# Altium PCB PCB_Koruza_expander_board.PcbDoc
Units mm, origin at the board's own origin, x right, y up, seen from the top; angles counter-clockwise.
Board outline 88.46 x 79.88 mm, 2 copper layers (Top Layer, Bottom Layer), stack 1.671 mm thick; 71 components, 51 nets, 238 pads, 221 vias.
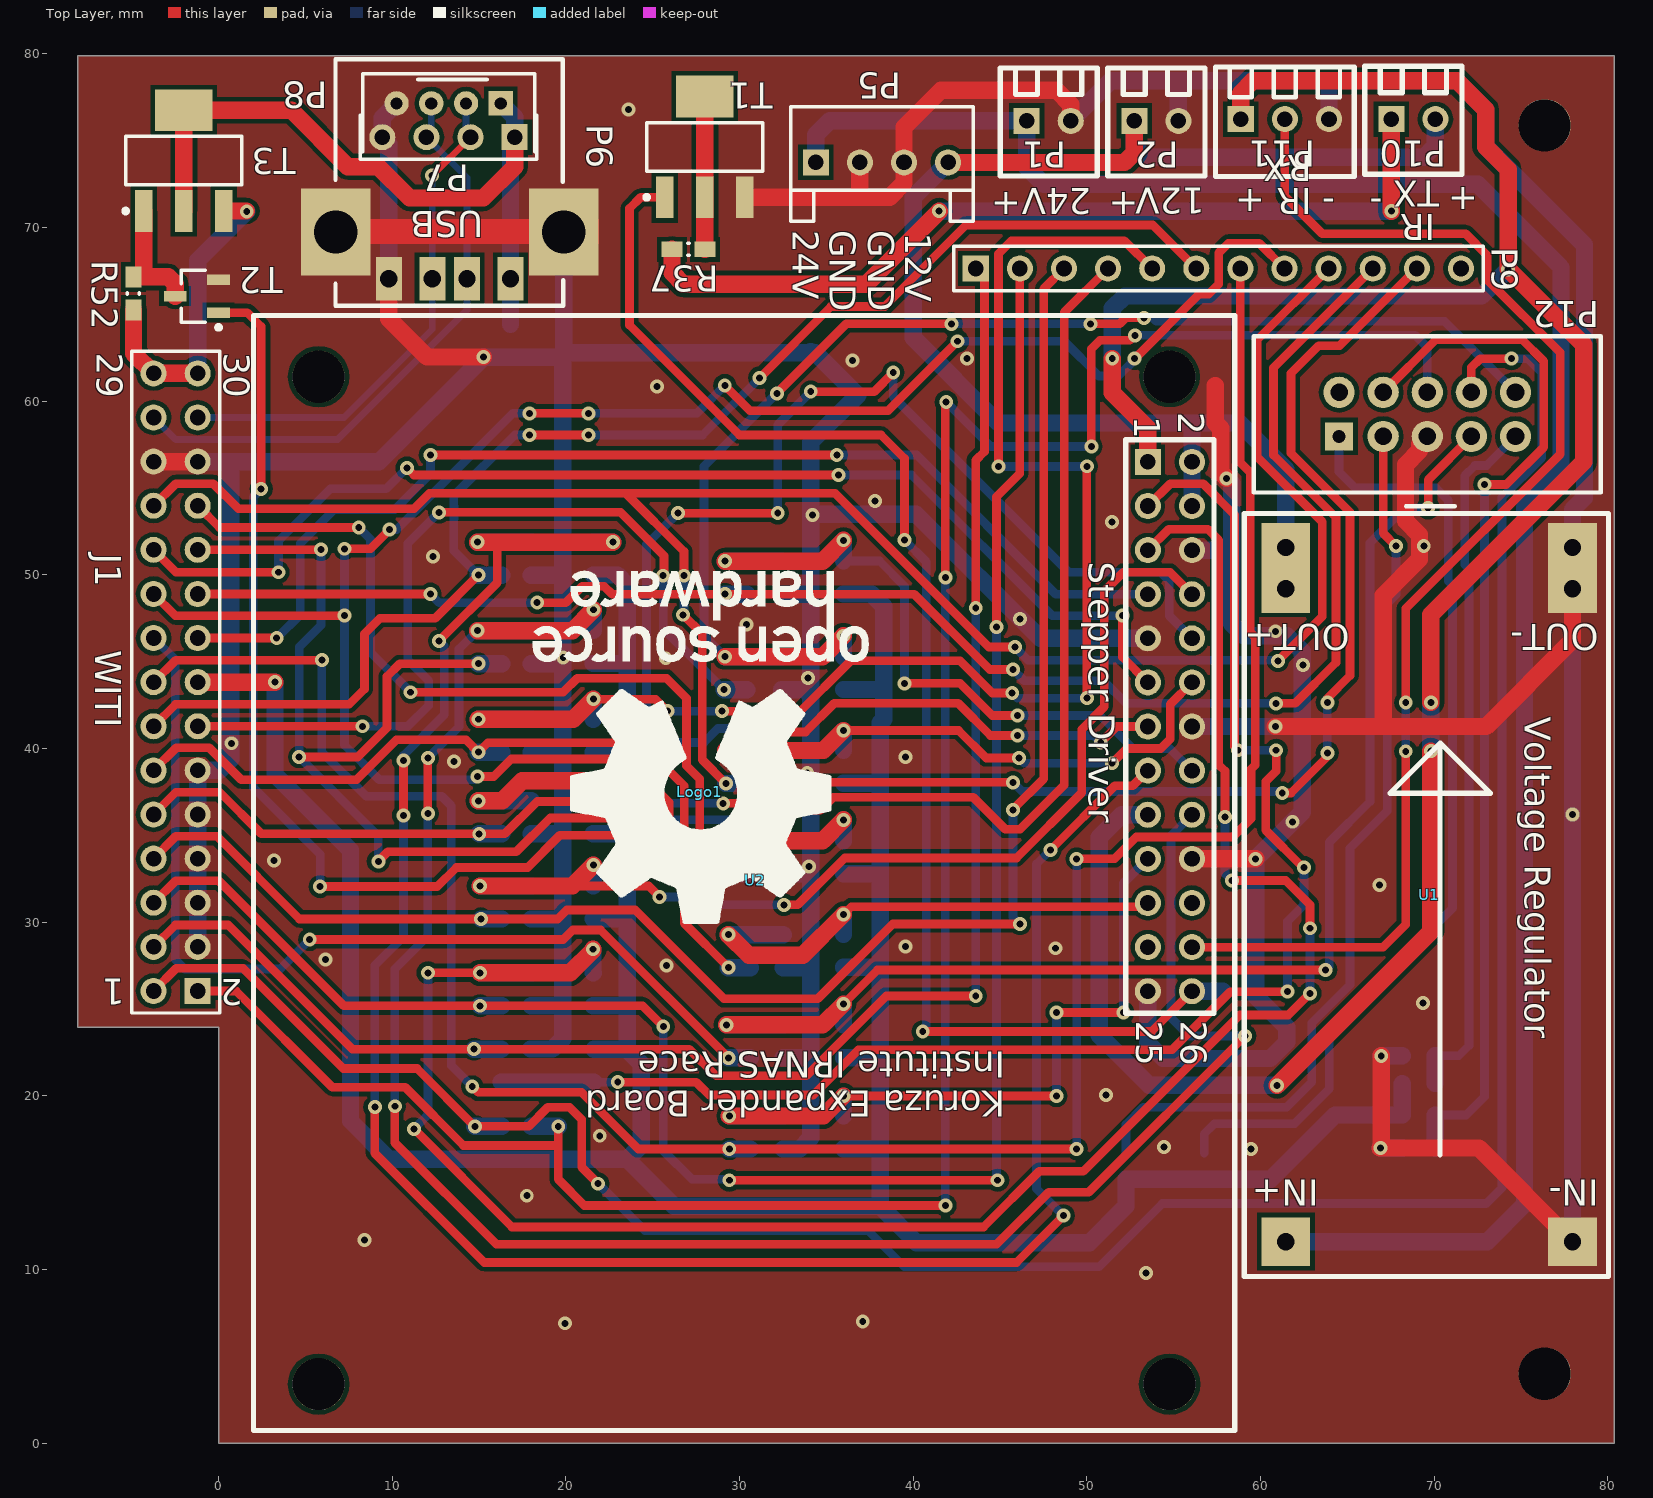
[diagram p0: Top Layer view]
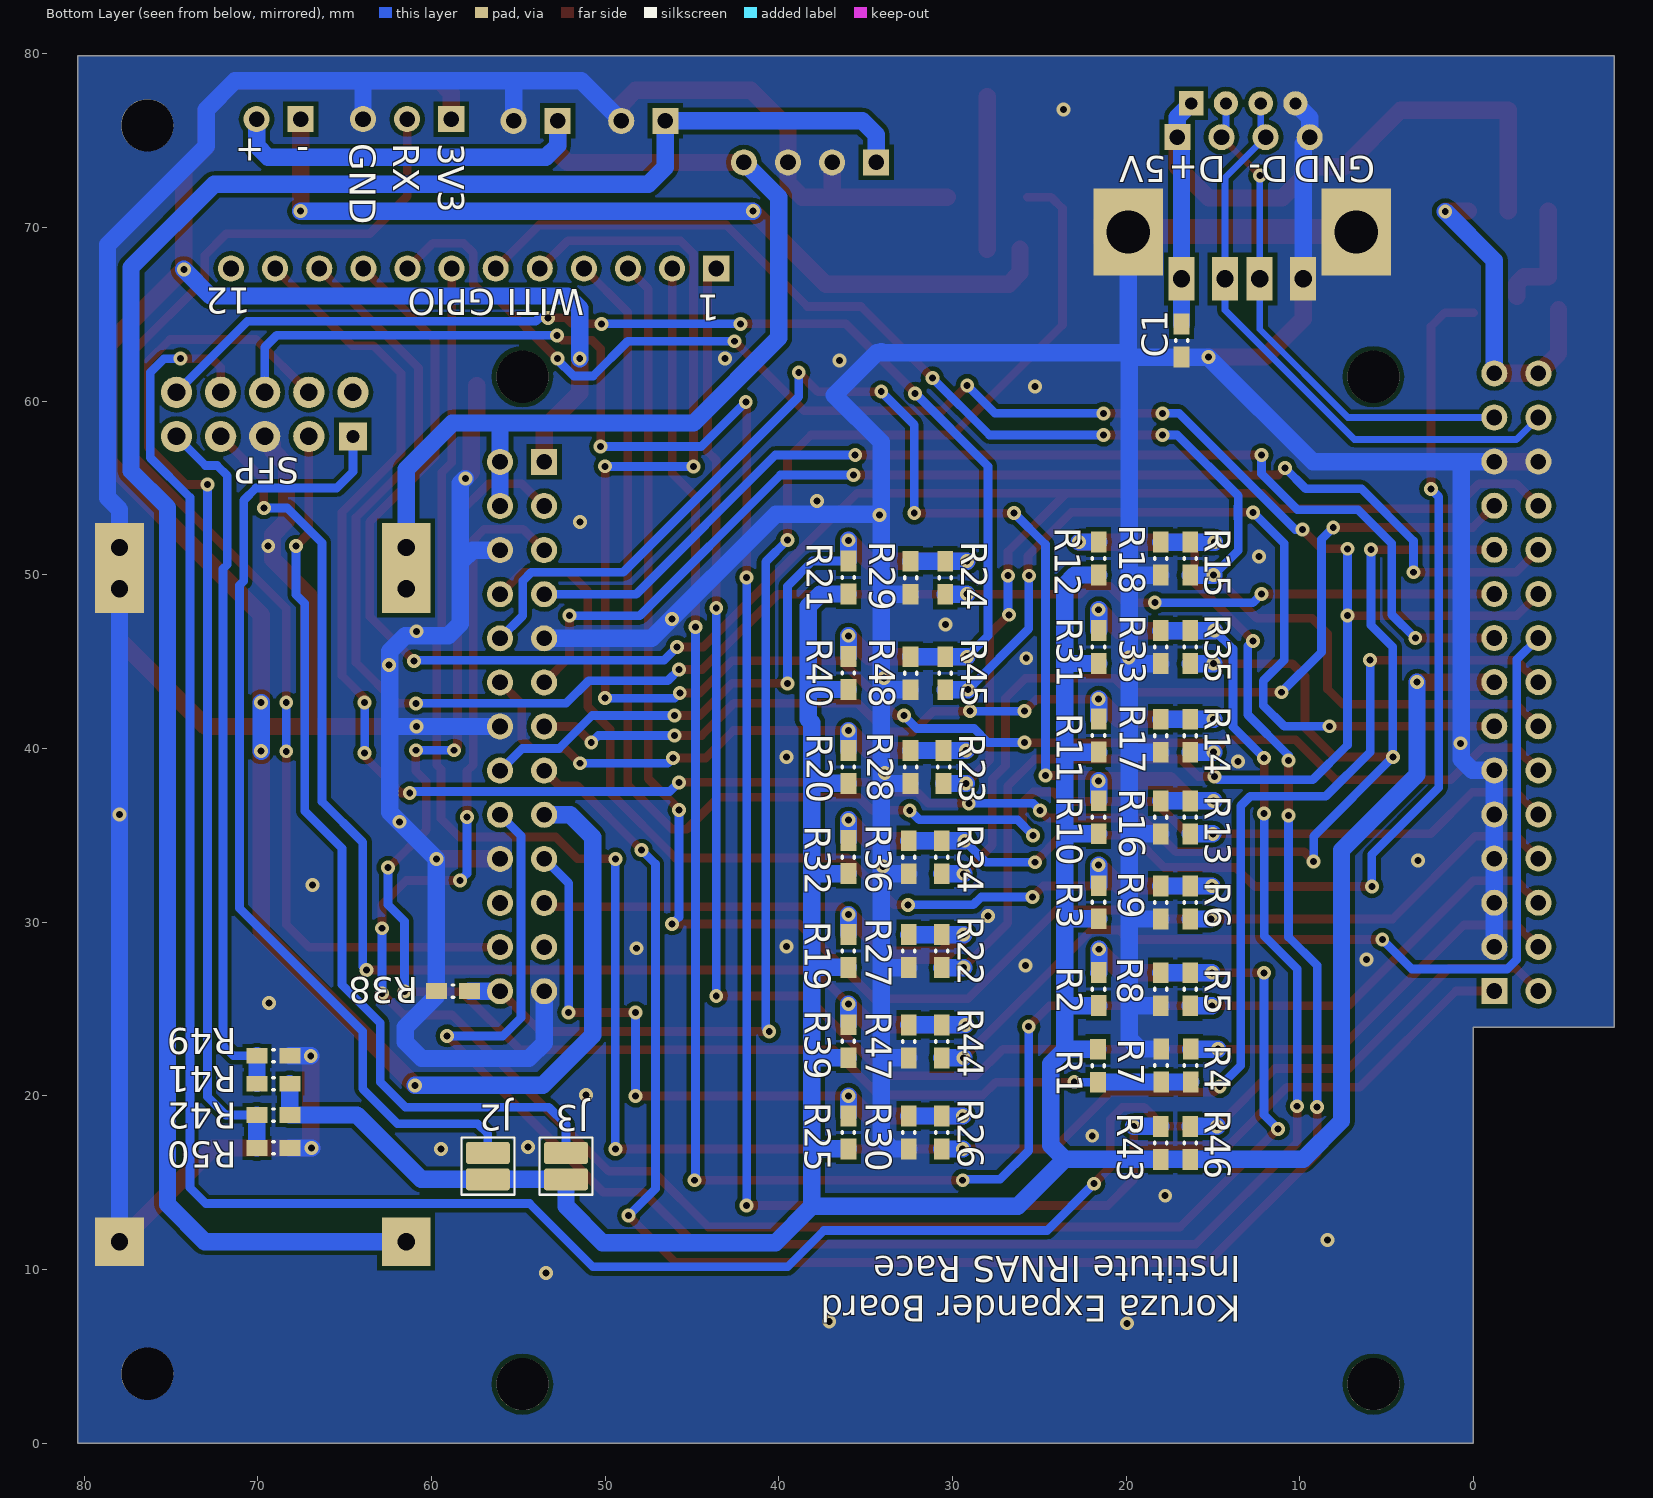
[diagram p1: Bottom Layer view, seen from below]

## Layer stack, top to bottom
Top Solder: solder mask 0.0102, Solder Resist, Dk 3.5
Top Layer: signal copper 0.0356
Dielectric 1: dielectric 1.6, FR-4, Dk 4.8
Bottom Layer: signal copper 0.0356
Bottom Solder: solder mask 0.0102, Solder Resist, Dk 3.5

## Board outline
-8.1,23.94 -8.1,79.883 80.36,79.883 80.36,0 0,0 0,23.94

## Design rules (kind name [scope] priority, off if disabled: settings)
Clearance Clearance_2 [InPolygon vs InPolygon] p1: gap=0.254
Clearance Clearance_3 [InPolygon] p2: gap=0.254
Clearance [All] p3: gap=0.203
Clearance Clearance_1 [IsVia vs IsNet] p4: gap=0.203
ComponentClearance [All] p1 off: gap=0.254 collisioncheckmode=3 verticalgap=0.254 showdistances=FALSE
DiffPairsRouting [All] p1: maxlimit=0.254 minlimit=0.203 mostfreqgap=0.254 toplayer_minwidth=0.203 toplayer_maxwidth=0.381 toplayer_prefwidth=0.381 bottomlayer_minwidth=0.203 bottomlayer_maxwidth=0.381 bottomlayer_prefwidth=0.381 maxuncoupledlength=12.7
HoleSize [All] p1: absolutevalues=TRUE maxlimit=100 minlimit=0.025 maxpercent=80.000 minpercent=20.000
MinimumSolderMaskSliver [All] p1: minsoldermaskwidth=0.102
PlaneConnect [All] p1: planeconnectstyle=Direct reliefexpansion=0.508 reliefentries=4 reliefconductorwidth=0.254 reliefairgap=0.254
PolygonConnect [All] p1: connectstyle=Direct reliefconductorwidth=0.254 reliefentries=4 polygonreliefangle="90 Angle" airgapwidth=0.254
RoutingVias [All] p1: holewidth=0.3 width=0.6 viastyle="Through Hole" minholewidth=0.3 minwidth=0.6 maxholewidth=1.27 maxwidth=2.54
SilkToSilkClearance [All] p1: silktosilkclearance=0
SilkToSolderMaskClearance [IsPad] p1: minsilkscreentomaskgap=0.025 clearancetoexposedcopper=TRUE
SolderMaskExpansion [All] p1: expansion=0.102
Width [All] p1: maxlimit=2.54 minlimit=0.203 preferedwidth=0.254
23 further rules are at their usual default settings.

## Classes and differential pairs
component class Sheet1_PWR_connectors: P1 P2 P5 U1
component class Sheet2_WITI_Board_USB: C1 J1 P6 P7 P8 P9 R1 R2 R3 R4 R5 R6 R7 R8 R9 R10 R11 R12 R13 R14 R15 R16 R17 R18 R19 R20 R21 R22 R23 R24 R25 R26 R27 R28 R29 R30 R31 R32 R33 R34 R35 R36 R52 T2 T3
component class Sheet3_IR: P10 P11 R37 R38 T1
component class Sheet4_SFP_StepperDriver: J2 J3 P12 R39 R40 R41 R42 R43 R44 R45 R46 R47 R48 R49 R50 U2
differential pair USB: +USB_P -USB_N

## Components (designator, comment, footprint, x,y, rotation, side; value= is the part's Value field where it differs from the comment)
C1 "0603" 0603_HandSoldering 16.81,63.49 r90 bottom
J1 "WITI_board_header_connector" HDR2X15 -1.2,26.04 r90 top locked
J2 "Jumper" JUMP1 56.75,15.95 r90 bottom
J3 "Jumper" JUMP1 52.25,15.95 r270 bottom
Logo1 "" OpenSourceLOGO 27.71,37.5 r180 top
P1 "term_block_2_45mm" term_block_2_45mm 47.8,76.14 r0 top
P2 "term_block_2_45mm" term_block_2_45mm 54,76.14 r0 top
P5 "Pwr Header" HDR1X4_CONN 38.2,73.75 r0 top
P6 "USB" "USB A THT" 16.81,67.04 r180 top
P7 "Header 4" HDR1X4 17.05,75.2 r180 top
P8 "Header 4, 2mm" HDR1X4_2MM 10.25,77.15 r180 top
P9 "Header 12" HDR1X12 43.6,67.64 r0 top
P10 "IR LED connector" term_block_2_45mm 68.8,76.24 r0 top
P11 "IR RX connector" TERM_BLOCK_3POLE_2_45MM 61.4,76.24 r0 top
P12 "SFP_IDC_connector" IDC10 69.6,59.24 r90 top locked
R1 "0603" 0603_HandSoldering 21.616,21.74 r90 bottom locked
R2 "0603" 0603_HandSoldering 21.584,26.14 r270 bottom locked
R3 "0603" 0603_HandSoldering 21.584,31.14 r270 bottom locked
R4 "0603" 0603_HandSoldering 16.284,21.74 r270 bottom locked
R5 "0603" 0603_HandSoldering 16.316,26.14 r90 bottom locked
R6 "0603" 0603_HandSoldering 16.316,31.14 r90 bottom locked
R7 "0603" 0603_HandSoldering 17.984,21.74 r270 bottom locked
R8 "0603" 0603_HandSoldering 18.016,26.14 r90 bottom locked
R9 "0603" 0603_HandSoldering 18.016,31.14 r90 bottom locked
R10 "0603" 0603_HandSoldering 21.584,36.04 r270 bottom locked
R11 "0603" 0603_HandSoldering 21.584,40.74 r270 bottom locked
R12 "0603" 0603_HandSoldering 21.584,50.94 r270 bottom locked
R13 "0603" 0603_HandSoldering 16.316,36.04 r90 bottom locked
R14 "0603" 0603_HandSoldering 16.316,40.74 r90 bottom locked
R15 "0603" 0603_HandSoldering 16.316,50.94 r90 bottom locked
R16 "0603" 0603_HandSoldering 18.016,36.04 r90 bottom locked
R17 "0603" 0603_HandSoldering 18.016,40.74 r90 bottom locked
R18 "0603" 0603_HandSoldering 18.016,50.94 r90 bottom locked
R19 "0603" 0603_HandSoldering 35.984,28.34 r270 bottom locked
R20 "0603" 0603_HandSoldering 35.984,38.94 r270 bottom locked
R21 "0603" 0603_HandSoldering 35.984,49.84 r270 bottom locked
R22 "0603" 0603_HandSoldering 30.616,28.34 r90 bottom locked
R23 "0603" 0603_HandSoldering 30.516,38.94 r90 bottom locked
R24 "0603" 0603_HandSoldering 30.416,49.84 r90 bottom locked
R25 "0603" 0603_HandSoldering 35.984,17.894 r270 bottom locked
R26 "0603" 0603_HandSoldering 30.616,17.894 r90 bottom locked
R27 "0603" 0603_HandSoldering 32.516,28.34 r90 bottom locked
R28 "0603" 0603_HandSoldering 32.416,38.94 r90 bottom locked
R29 "0603" 0603_HandSoldering 32.416,49.84 r90 bottom locked
R30 "0603" 0603_HandSoldering 32.516,17.894 r90 bottom locked
R31 "0603" 0603_HandSoldering 21.584,45.84 r270 bottom locked
R32 "0603" 0603_HandSoldering 35.984,33.74 r270 bottom locked
R33 "0603" 0603_HandSoldering 16.316,45.84 r90 bottom locked
R34 "0603" 0603_HandSoldering 30.616,33.74 r90 bottom locked
R35 "0603" 0603_HandSoldering 18.016,45.84 r90 bottom locked
R36 "0603" 0603_HandSoldering 32.516,33.74 r90 bottom locked
R37 "0603" 0603_HandSoldering 27.06,68.74 r180 top
R38 "0603" 0603_HandSoldering 58.76,26.04 r180 bottom
R39 "0603" 0603_HandSoldering 35.984,23.14 r270 bottom locked
R40 "0603" 0603_HandSoldering 35.984,44.34 r270 bottom locked
R41 "0603" 0603_HandSoldering 69.1,20.7 r180 bottom
R42 "0603" 0603_HandSoldering 69.1,18.9 r180 bottom
R43 "0603" 0603_HandSoldering 18.016,17.294 r90 bottom locked
R44 "0603" 0603_HandSoldering 30.616,23.14 r90 bottom locked
R45 "0603" 0603_HandSoldering 30.416,44.34 r90 bottom locked
R46 "0603" 0603_HandSoldering 16.316,17.294 r90 bottom locked
R47 "0603" 0603_HandSoldering 32.516,23.14 r90 bottom locked
R48 "0603" 0603_HandSoldering 32.416,44.34 r90 bottom locked
R49 "0603" 0603_HandSoldering 69.1,22.3 r0 bottom
R50 "0603" 0603_HandSoldering 69.1,17 r0 bottom
R52 "0603" 0603_HandSoldering -4.9,66.2 r270 top
T1 "PHT6N06T" SOT230P700X180-4N 28,74.64 r90 top
T2 "RSR010N10FHATL" SOT23-3 -1.25,66.05 r180 top
T3 "NDT2955" SOT230P700X180-4N -2,73.85 r90 top
U1 "LM2596 module" "LM2596 MODULE" 77.96,11.6 r180 top locked
U2 "Universal_Stepper_Driver_RPI_Header" UNIVERSAL_STEPPER_DRIVER_BOARD 5.76,3.4 r180 top locked

## Footprints (in the part's own frame and the unit in brackets; to place one, negate y for a bottom-side part, rotate by r counter-clockwise, add the part's x,y. Pads: shape width x height; smd on the part's side, far side on the other; paste and mask are expansions set on the pad)
0603_HandSoldering [mm] "Chip Resistor, 2-Leads, Body 1.6x0.8mm, IPC Medium Density"
  rect 1.2x0.9 smd: 1(-0.954,0) 2(0.946,0)
  silkscreen extent -0.05,-0.36 0.05,0.34, body extent -0.85,-0.48 0.85,0.47, height 0.6
HDR1X4 [mm] "Connector; Header; 4 Position"
  rect 1.5x1.5 hole 0.9: 1(0,0)
  round 1.5 hole 0.9: 2(2.54,0) 3(5.08,0) 4(7.62,0)
  silkscreen extent -1.27,-1.27 8.89,1.27, body extent -1.27,-1.24 8.89,1.24, height 8.54
HDR1X4_2MM [mm] "Connector; Header; 4 Position; 2mm pitch"
  rect 1.4x1.4 hole 0.7: 1(-6,0)
  round 1.4 hole 0.7: 2(-4,0) 3(-2,0) 4(0,0)
  silkscreen extent -7.95,-1.7 1.95,2.8
HDR1X4_CONN [mm] "Connector; Header; 4 Position"
  rect 1.5x1.5 hole 0.9: 1(-3.81,0)
  round 1.5 hole 0.9: 2(-1.27,0) 3(1.27,0) 4(3.81,0)
  silkscreen extent -5.26,-3.4 5.26,3.2, body extent -5.08,-1.24 5.08,1.24, height 8.54
HDR1X12 [mm] "Connector; Header; 12 Position"
  rect 1.5x1.5 hole 0.9: 1(0,0)
  round 1.5 hole 0.9: 2(2.54,0) 3(5.08,0) 4(7.62,0) 5(10.16,0) 6(12.7,0) 7(15.24,0) 8(17.78,0) 9(20.32,0) 10(22.86,0) 11(25.4,0) 12(27.94,0)
  silkscreen extent -1.27,-1.27 29.21,1.27, body extent -1.27,-1.24 29.21,1.25, height 8.54
HDR2X15 [mm] "Connector; Header; 15x2 Position"
  round 1.5 hole 0.9: 1(0,2.54) 3(2.54,2.54) 4(2.54,0) 5(5.08,2.54) 6(5.08,0) 7(7.62,2.54) 8(7.62,0) 9(10.16,2.54) 10(10.16,0) 11(12.7,2.54) 12(12.7,0) 13(15.24,2.54) 14(15.24,0) 15(17.78,2.54) 16(17.78,0) 17(20.32,2.54) 18(20.32,0) 19(22.86,2.54) 20(22.86,0) 21(25.4,2.54) 22(25.4,0) 23(27.94,2.54) 24(27.94,0) 25(30.48,2.54) 26(30.48,0) 27(33.02,2.54) 28(33.02,0) 29(35.56,2.54) 30(35.56,0)
  rect 1.5x1.5 hole 0.9: 2(0,0)
  silkscreen extent -1.27,-1.27 36.83,3.81, body extent -1.27,-0.3 36.83,12.65, height 5.08
IDC10 [mm] "2.54mm header 2x5"
  rect 1.624x1.624 hole 0.762: 1(-1.27,5.08)
  round 1.8 hole 1.01: 2(-1.27,2.54) 3(-1.27,0) 4(-1.27,-2.54) 5(-1.27,-5.08) 6(1.27,5.08) 7(1.27,2.54) 8(1.27,0) 9(1.27,-2.54) 10(1.27,-5.08)
  silkscreen extent -5.3,-10 4.5,10, body extent -4.53,-10.15 4.57,10.15, height 9.3
JUMP1 [mil] "SMT Battery jumper pads"
  rrect25% 50x100 smd: 1(-30,0) 2(30,0)
  rrect50% 118x108 on Bottom Solder: SM(0,0)
  silkscreen extent -65,-60 65,60
"LM2596 MODULE" [mm] "ebay LM2596 module"
  rect 2.8x2.8 hole 1: 1(0,0) 2(16.5,0) 3(16.5,-39.975) 3(16.5,-37.6) 4(0,-37.6) 4(0,-39.975)
  silkscreen extent -2.07,-41.93 18.9,2, body extent -2.15,-41.5 18.85,2, height 15.41
OpenSourceLOGO [mm]
  silkscreen extent -9.72,-12.73 9.6,7.57
SOT23-3 [mm] "SOT23, 3-Leads, Body 2,90x2,80mm, Pitch 0,95mm, IPC Medium Density"
  rect 1.3x0.6 smd: 1(-1.25,0.95) 2(-1.25,-0.95) 3(1.25,0)
  silkscreen extent -1.38,-1.5 0.9,1.92, body extent -0.9,-1.5 0.9,1.5, height 1
SOT230P700X180-4N [mm] "SOT223, 4-Leads, Body 6,50x7,00mm (avg), Pitch 2,30mm, IPC Medium Density"
  rect 2.4x1 smd: 1(-2.9,2.3) 2(-2.9,0) 3(-2.9,-2.3)
  rect 2.4x3.3 smd: 4(2.9,0)
  silkscreen extent -3.02,-3.35 1.4,3.47, body extent -1.85,-3.35 1.85,3.35, height 1.8
term_block_2_45mm [mm] "terminal block 2.45mm"
  rect 1.5x1.5 hole 0.9: 1(-1.27,0)
  round 1.5 hole 0.9: 2(1.27,0)
  silkscreen extent -2.79,-3.17 2.79,3.05, body extent -2.77,-3.05 2.77,3.15, height 8.5
TERM_BLOCK_3POLE_2_45MM [mm] "terminal block 2.45mm 3-pole"
  rect 1.5x1.5 hole 0.9: 1(-2.54,0)
  round 1.5 hole 0.9: 2(0,0) 3(2.54,0)
  silkscreen extent -4,-3.3 4,3, body extent -4,-3.2 4,3, height 8.5
UNIVERSAL_STEPPER_DRIVER_BOARD [mm] "Universal Stepper Driver board"
  round 3 hole 3: 0(-49,0) 0(-49,-58.005) 0(0,0) 0(0,-58.005)
  rect 1.5x1.5 hole 0.9: 1(-47.75,-53.105)
  round 1.5 hole 0.9: 2(-50.29,-53.105) 3(-47.75,-50.565) 4(-50.29,-50.565) 5(-47.75,-48.025) 6(-50.29,-48.025) 7(-47.75,-45.485) 8(-50.29,-45.485) 9(-47.75,-42.945) 10(-50.29,-42.945) 11(-47.75,-40.405) 12(-50.29,-40.405) 13(-47.75,-37.865) 14(-50.29,-37.865) 15(-47.75,-35.325) 16(-50.29,-35.325) 17(-47.75,-32.785) 18(-50.29,-32.785) 19(-47.75,-30.245) 20(-50.29,-30.245) 21(-47.75,-27.705) 22(-50.29,-27.705) 23(-47.75,-25.165) 24(-50.29,-25.165) 25(-47.75,-22.625) 26(-50.29,-22.625)
  silkscreen extent -52.75,-61.53 3.75,2.67, body extent -52.96,-61.72 4.04,3.28, height 18.7
"USB A THT" [mm]
  rect 1.5x2.5 hole 1: 1(0,0) 2(2.5,0) 3(4.5,0) 4(7,0)
  rect 4x5 hole 2.5: 5(-3.07,-2.7) 5(10.07,-2.7)
  silkscreen extent -3.05,-12.65 10.07,1.55, body extent -3.68,-12.8 10.92,1.43, height 8.03

## Part data
C1: library part capacitor_ceramic, "Ceramic Capacitor"
J1: "WITI board header connector"
J2 J3: library part JUMP1, "SMD jumper"
P1 P2: "terminal block, 2.45mm"
P5: library part 1x4_pwr_header, "1X4 Pwr Header"
P6: "USB A standard receptacle"
P7: "Header, 4-Pin"
P8: library part "Header 4 - 2mm", "Header, 4-Pin, 2mm"
P9: "Header, 12-Pin"
P10: library part IR_LED_connector
P11: library part IR_RX_connector
P12: "SFP IDC10 connector"
R1 R2 R3 R4 R5 R6 R7 R8 R9 R10 R11 R12 R13 R14 R15 R16 R17 R18 R19 R20 R21 R22 R23 R24 R25 R26 R27 R28 R29 R30 R31 R32 R33 R34 R35 R36 R37 R38 R39 R40 R41 R42 R43 R44 R45 R46 R47 R48 R49 R50 R52: library part resistor, "Resistor"
T1 T2: "N MOSFET"
T3: "P MOSFET"
U2: library part Universal_Stepper_Driver, "Universal Stepper Driver Raspberry PI Header"

## Free pads (board coordinates)
  round 3 hole 3: 0(76.36,4) 0(76.36,75.883)

## Via types
v1: diameter 0.8, hole 0.4, Top Layer to Bottom Layer, tented both sides, 221 vias

## Nets (pads, with @x,y where several pads share a name; then routed paths per layer and width w, separated by ;. In a path a pad name is that pad's centre, name@x,y a point inside that pad or via, vN(x,y) a via of type N, cw(c..) or ccw(c..) an arc to the next point about the centre after c; other vN are vias at no path point)
3V3_STEPPER: P11.1 U2.1 U2.17 | length 142
  Top Layer w1: v1(51.46,62.45) 51.46,60.49 53.51,58.44 U2.1 ; P11.1 58.86,77.74 59.56,78.44 71.31,78.44 72.96,76.79 72.96,74.64 74.26,73.34 v1(74.26,67.59) 78.61,63.24 78.61,56.51 69.81,47.71 v1(69.81,42.65) ; v1(60.95,20.6) 69.81,29.46 v1(69.81,39.85)
  Bottom Layer w1: v1(51.46,62.45) 51.46,65.34 52.173,66.053 72.723,66.053 v1(74.26,67.59) ; U2.17 52.005,36.185 50.71,34.89 50.71,23.49 53.6,20.6 v1(60.95,20.6) ; v1(69.81,39.85) v1(69.81,42.65)
3V3_WITI: J1.16 J2.1 J3.2 R1.2 R2.2 R3.2 R10.2 R11.2 R12.2 R19.2 R20.2 R21.2 R25.2 R31.2 R32.2 R39.2 R40.2 R41.2 R42.2 R43.1 R46.1 | length 197.8
  Top Layer w1: J1.16 v1(3.25,43.82)
  Bottom Layer w1: v1(3.25,43.82) 3.25,38.5 7.6,34.15 7.6,18.55 9.81,16.34 R46.1 R43.1 23.54,16.34 ; R2.2 23.486,25.194 ; R3.2 23.494,30.194 ; R10.2 23.394,35.094 ; R11.2 23.494,39.794 ; R31.2 23.486,44.894 ; R12.2 22.956,49.994 23.54,49.41 23.54,22.686 ; R1.2 23.506,22.686 ; 23.54,22.652 24.35,21.842 24.35,17.15 23.54,16.34 ; R25.2 37.948,16.948 ; R39.2 38.044,22.194 ; R19.2 38.05,27.394 ; R32.2 38.1,32.794 ; R20.2 38.1,37.994 ; R40.2 38.218,43.394 ; R21.2 37.606,48.894 38.314,48.186 38.314,41.688 38.1,41.474 38.1,37.994 ; R41.2@68.15,20.7 68.15,18.9 64.3,18.9 60.588,15.188 J2.1 J3.2 52.25,13.65 50.15,11.55 40.19,11.55 38.1,13.64 ; 23.54,16.34 26.24,13.64 38.1,13.64 ; 38.1,13.64 38.1,32.794 ; 38.1,32.794 38.1,37.994
5V_USB: J1.29 J1.30 R52.2 T3.3 | length 18.5
  Top Layer w1: R52.2 -4.9,62.76 J1.29 J1.30 ; T3.3 v1@1.6,70.95
  Bottom Layer w1: J1.30 -1.2,68.1 v1(1.625,70.925)
12V_REGULATED: P2.1 P5.4 P10.2 U1.3 U2.2 U2.4 | length 80.8
  Top Layer w1: P5.4 42.02,73.74 52.16,73.74 52.73,74.31 P2.1
  Bottom Layer w1: P5.4 40,71.74 40,63.65 44.91,58.74 56.05,58.74 ; P2.1 52.73,74.72 53.41,74.04 69.41,74.04 70.07,74.7 P10.2 ; U2.4 U2.2 56.05,58.74 ; U1.3@61.46,49.2 61.46,51.575 61.46,56.09 58.81,58.74 56.05,58.74
24V_PWR: P1.1 P5.1 U1.2 | length 119.3
  Bottom Layer w1: P5.1 34.39,75.34 35.19,76.14 P1.1 46.53,73.47 47.51,72.49 72.51,72.49 77.3,67.7 77.3,55.98 75.2,53.88 75.2,13.75 73.05,11.6 U1.2
GND: C1.1 J1.4 J1.6 J1.8 J1.10 J1.12 J1.25 J1.26 P1.2 P2.2 P5.2 P5.3 P6.4 P6.5 P7.4 P8.4 P11.3 P12.3 pad.0 R7.1 R8.1 R9.1 R16.1 R17.1 R18.1 R27.1 R28.1 R29.1 R30.1 R35.1 R36.1 R38.1 R47.1 R48.1 R49.1 R50.1 T1.3 T2.2 U1.1 U1.4 U2.6 U2.9 U2.14 U2.20 U2.25 | length 480.3
  Top Layer w1: J1.25 J1.26 ; P6.4 9.81,64.74 12.01,62.54 v1(15.26,62.54) ; T1.3 38.64,71.74 39.47,72.57 P5.3 39.47,75.77 41.6,77.9 48.25,77.9 49.07,77.08 P1.2 ; 36.93,71.77 P5.2 ; U2.20 v1(59.714,33.645) ; 57.4,60.9 57.4,58.75 57.7,58.45 57.7,55.9 v1(58.05,55.55) ; v1(60.85,41.265) 67.06,41.265 ; v1(66.95,22.3) 66.95,17.05 v1(66.9,17) 72.56,17 U1.1 ; P12.3 69.15,57.52 69.15,57.15 68.35,56.35 68.35,53.1 69.15,52.3 69.15,50.9 67.06,48.81 67.06,41.265 ; U1.4@77.96,49.2 77.96,46.24 72.985,41.265 67.06,41.265
  Bottom Layer w1: J1.4 J1.6 J1.8 J1.10 J1.12 0.06,38.74 0.71,39.39 0.71,56.52 ; J1.26 0.71,56.52 ; P6.4 9.81,74.82 P7.4 9.43,76.33 P8.4 ; v1(15.26,62.54) 9.24,56.52 0.71,56.52 ; v1@15.264,62.536 C1.1 19.81,62.536 ; R7.1 19.214,22.694 19.81,23.29 19.81,49.986 ; R8.1 19.656,25.186 ; R9.1 19.706,30.186 ; R16.1 19.706,35.086 ; R17.1 19.756,39.786 ; R35.1 19.656,44.886 ; R18.1 19.81,49.986 ; P6.5@19.88,69.74 19.88,62.606 ; R28.1 34.006,37.986 ; R48.1 34.106,43.386 ; R29.1 34.11,48.886 ; R30.1 33.46,16.94 34.11,17.59 34.11,48.886 ; R47.1 34.106,22.186 ; R27.1 34.056,27.386 ; R36.1 34.006,32.786 ; 34.11,62.86 34.11,62.79 ; P1.2 51.37,78.44 71.31,78.44 72.96,76.79 72.96,74.69 78.65,69 78.65,54.43 77.96,53.74 U1.4@77.96,51.575 ; U2.25 53.51,23.04 54.4,22.15 60.55,22.15 61.5,23.1 61.5,23.95 59.714,25.736 R38.1 v1(59.714,33.645) 62.4,36.331 62.4,41.265 ; U2.9 47.305,46.345 40.16,53.49 v1@34.11,53.49 ; P2.2 55.27,78.43 ; U2.14 62.4,41.265 ; U2.6 57.625,51.425 58.335,50.715 ; v1(58.05,55.55) 58.335,55.265 58.335,50.715 ; P11.3 63.94,78.44 ; v1(66.9,17) R50.1@68.15,17 ; v1(66.95,22.3) R49.1@68.15,22.3 ; U1.1 U1.4@77.96,49.2 ; 19.81,49.986 19.81,62.536 ; 19.81,62.536 19.88,62.606 ; 19.88,62.606 20.064,62.79 34.11,62.79 ; 34.11,48.886 v1@34.11,53.49 ; v1@34.11,53.49 34.11,57.65 36.8,60.34 34.35,62.79 34.11,62.79 ; 58.335,50.715 58.335,47.19 59.025,46.5 61.5,46.5 62.4,45.6 62.4,41.265
  other v1: 19.946,6.904 37.096,7.004 53.4,9.8 8.396,11.704 17.75,14.25 59.45,16.95 54.45,17.05 21.95,17.7 51.1,20.05 69.35,25.35 25.8,27.5 6.15,27.85 48.2,28.5 39.55,28.6 27.95,30.35 66.85,32.15 34,33.2 3.2,33.55 61.85,35.781 77.956,36.204 33.9,38.6 13.55,39.25 39.55,39.5 0.75,40.3 33.95,44.05 62.45,44.8 25.75,45.2 19.85,45.25 60.85,46.75 30.4,47.15 46.15,47.45 12.35,51.05 69.4,51.65 51.45,53.05 34.2,53.45 37.8,54.25 25.246,60.854 36.5,62.35 43.1,62.45 23.596,76.804
NetC1_2: C1.2 P6.1 P7.1 P8.1 T3.2 T3.4 | length 42.5
  Top Layer w1: T3.2 T3.4 4.2,76.75 7.45,73.5 9.2,73.5 11,71.7 15.25,71.7 17.05,73.5 P7.1
  Bottom Layer w1: P8.1 17.05,76.35 P7.1 16.81,74.96 P6.1 C1.2
NetJ1_1: J1.1 P12.9 R46.2 | length 145.2
  Top Layer w0.5: J1.1 -2.44,27.34 1.41,27.34 7.175,21.575 11.425,21.575 v1(14.76,18.24) 17.86,18.24 18.96,19.34 20.21,19.34 20.91,18.64 20.91,15.89 v1(21.86,14.94) ; P12.9 72.14,61.94 72.65,62.45 v1(74.45,62.45)
  Bottom Layer w0.5: v1(21.86,14.94) 24.55,12.25 37.4,12.25 39.5,10.15 50.7,10.15 54.35,13.8 73,13.8 73.9,14.7 73.9,54.45 76.2,56.75 76.2,61.65 75.4,62.45 v1(74.45,62.45)
  Bottom Layer w1: v1(14.76,18.24) R46.2
NetJ1_2: J1.2 P12.8 R43.2 | length 135.8
  Top Layer w0.5: J1.2 1.01,26.04 6.55,20.5 10.75,20.5 14.11,17.14 19.56,17.14 ; v1(19.56,18.24) 19.56,17.14 ; v1(41.85,49.85) 41.85,59.9 v1(41.9,59.95) ; v1(41.86,13.69) 21.06,13.69 19.56,15.19 19.56,17.14 ; v1(50.26,57.39) 50.26,63.01 50.75,63.5 52.47,63.5 v1(52.76,63.79)
  Bottom Layer w0.5: v1(41.85,49.85) 41.85,13.7 v1(41.86,13.69) ; v1(41.9,59.95) 44.46,57.39 v1(50.26,57.39) ; v1(52.76,63.79) 68.91,63.79 69.6,63.1 P12.8
  Bottom Layer w1: R43.2 v1(19.56,18.24)
NetJ1_3: J1.3 P9.1 R4.1 | length 97.3
  Top Layer w0.5: J1.3 -2.48,29.84 0.56,29.84 7.71,22.69 v1(14.71,22.69) 27.11,22.69 28.65,21.15 33.85,21.15 38.45,25.75 v1(43.6,25.75) ; v1(43.6,48.1) 43.6,56.6 44.1,57.1 44.1,67.14 P9.1
  Bottom Layer w0.5: R4.1@16.28,22.69 R4.1 ; v1(43.6,48.1) 43.6,25.76 v1@43.61,25.75
  Bottom Layer w1: v1(14.71,22.69) R4.1@16.28,22.69
NetJ1_5: J1.5 P9.2 R5.1 | length 114.8
  Top Layer w0.5: J1.5 -2.47,32.39 0.01,32.39 7.214,25.186 v1(15.06,25.186) 24.414,25.186 v1(25.61,23.99) ; v1(29.41,15.14) v1(44.86,15.14) ; v1(44.8,47) 44.8,54.5 46.14,55.84 P9.2
  Bottom Layer w0.5: v1(25.61,23.99) 25.61,16.84 27.26,15.19 29.36,15.19 v1(29.41,15.14) ; v1(44.8,47) 44.8,15.18 v1@44.84,15.14
  Bottom Layer w1: v1(15.06,25.186) R5.1
NetJ1_7: J1.7 P9.3 R6.1 | length 96.8
  Top Layer w0.5: J1.7 -2.46,34.94 -0.09,34.94 4.664,30.186 v1(15.11,30.186) 19.536,30.186 20.05,30.7 24,30.7 29.11,25.59 34.51,25.59 38.82,29.9 v1(46.15,29.9) ; v1(45.75,36.45) 45.75,36.5 47.513,38.263 47.513,66.473 P9.3
  Bottom Layer w0.5: v1(45.75,36.45) 45.75,30.3 v1(46.15,29.9)
  Bottom Layer w1: v1(15.11,30.186) R6.1
NetJ1_9: J1.9 P9.4 R13.1 | length 92.8
  Top Layer w0.5: J1.9 -2.45,37.49 0.06,37.49 2.464,35.086 v1(15.01,35.086) 16.486,35.086 18.35,36.95 23.65,36.95 24.2,37.5 25.35,37.5 25.96,36.89 25.96,35.59 v1(25.36,34.99) ; v1(32.46,36.44) 34.64,36.44 35.4,37.2 43.45,37.2 45.3,35.35 46.15,35.35 48.7,37.9 48.7,65.12 P9.4
  Bottom Layer w0.5: v1(25.36,34.99) 26.26,35.89 31.91,35.89 v1(32.46,36.44)
  Bottom Layer w1: v1(15.01,35.086) R13.1
NetJ1_11: J1.11 P9.5 R14.1 | length 101.4
  Top Layer w0.5: J1.11 -2.44,40.04 -0.54,40.04 1.3,38.2 7.95,38.2 10.25,40.5 14.246,40.5 v1(14.96,39.786) 15.514,40.34 25.64,40.34 25.8,40.5 25.85,40.45 v1(25.85,40.35) ; v1(32.8,41.9) 33.25,41.9 36.4,45.05 42.7,45.05 44.55,43.2 v1(45.7,43.2) ; v1(44.91,56.24) 44.91,68.49 45.66,69.24 52.16,69.24 P9.5 ; v1(50,42.9) v1(50,56.25)
  Bottom Layer w0.5: v1(25.85,40.35) 27.95,40.35 28.75,41.15 32.05,41.15 v1(32.8,41.9) ; v1(44.91,56.24) v1@50,56.24 ; v1(45.7,43.2) 46,42.9 v1(50,42.9)
  Bottom Layer w1: v1(14.96,39.786) R14.1
NetJ1_13: J1.13 P9.6 R15.1 | length 80.9
  Top Layer w0.5: J1.13 -2.48,42.54 7.514,42.54 8.4,43.426 8.4,46.6 9.3,47.5 12.474,47.5 v1(14.96,49.986) ; v1(17.9,58.05) v1(21.3,58.05) ; v1(31.16,61.34) 35.27,65.45 38.35,65.45 43.04,70.14 53.8,70.14 P9.6
  Bottom Layer w0.5: v1(14.96,49.986) 13.55,51.396 13.55,53.243 13.553,53.247 13.553,53.953 13.55,53.957 13.55,54.55 17.05,58.05 v1@17.91,58.05 ; v1(21.3,58.05) 27.87,58.05 v1(31.16,61.34)
  Bottom Layer w1: v1(14.96,49.986) R15.1
NetJ1_14: J1.14 R45.1 | length 50.6
  Top Layer w0.5: J1.14 v1(8.3,41.28) ; v1(12.7,53.6) 23.15,53.6 25.65,51.1 25.65,50.2 v1@25.5,50.05
  Bottom Layer w0.5: v1(8.3,41.28) 10.9,41.28 12.1,42.48 12.1,43.9 10.9,45.1 10.9,51.8 v1(12.7,53.6) ; v1(25.6,49.95) 25.6,46.896 v1(29.11,43.386)
  Bottom Layer w1: v1(29.11,43.386) R45.1
NetJ1_15: J1.15 P9.7 R26.1 | length 138.3
  Top Layer w0.5: J1.15 -2.47,45.09 v1@5.95,45.09 ; v1(14.61,20.54) 14.95,20.2 20.9,20.2 24.16,16.94 v1(29.41,16.94) v1(49.41,16.94) ; v1(49.41,33.645) 51.595,33.645 52.85,34.9 58.4,34.9 59.45,35.95 59.45,38.8 59.7,39.05 59.7,46.4 59.403,46.697 59.403,55.897 58.84,56.46 P9.7
  Bottom Layer w0.5: v1(5.95,45.1) 5.95,39.8 8.5,37.25 12.85,37.25 13.4,36.7 13.4,21.75 v1(14.61,20.54) ; v1(49.41,16.94) v1(49.41,33.645)
  Bottom Layer w1: v1(29.41,16.94) R26.1
NetJ1_17: J1.17 R44.1 | length 56.3
  Top Layer w0.5: v1(5.25,29) 19.85,29 20.4,29.55 21.996,29.55 v1(29.36,22.186)
  Bottom Layer w0.5: J1.17 -2.5,45.12 -2.5,27.85 -1.95,27.3 3.55,27.3 v1(5.25,29)
  Bottom Layer w1: v1(29.36,22.186) R44.1
NetJ1_18: J1.18 U2.7 | length 65.4
  Top Layer w0.5: J1.18 v1(3.35,46.36) ; v1(12.2,56.9) v1(35.6,56.9)
  Bottom Layer w0.5: v1(3.35,46.36) 4.7,47.71 4.7,51.8 6.65,53.75 10.13,53.75 12.2,55.82 v1(12.2,56.9) ; v1(35.6,56.9) 40.2,56.9 48.215,48.885 U2.7
NetJ1_19: J1.19 P9.8 R22.1 | length 123.1
  Top Layer w0.5: J1.19 -2.48,47.64 v1@7.25,47.64 ; v1(7.25,51.5) 8.75,51.5 v1(9.85,52.6) ; v1(14.91,38.39) 15.84,38.39 16.85,39.4 25.25,39.4 26.81,37.84 26.81,29.936 v1(29.36,27.386) ; v1(17.9,59.3) v1(21.3,59.3) ; v1(29.15,60.9) 30.6,59.45 38.55,59.45 v1(42.55,63.45) ; v1(52.75,62.45) 56.45,66.15 57,66.15 57.6,66.75 57.6,68.55 58.15,69.1 59.92,69.1 P9.8
  Bottom Layer w0.5: v1(7.25,51.5) v1(7.25,47.65) 7.25,40.2 9.25,38.2 14.72,38.2 v1(14.91,38.39) ; v1(9.85,52.6) 10.25,52.6 16.95,59.3 v1(17.9,59.3) ; v1(21.3,59.3) 27.55,59.3 v1(29.15,60.9) ; v1(42.55,63.45) 48.7,63.45 50.7,61.45 51.808,61.45 52.75,62.392 v1(52.75,62.45)
  Bottom Layer w1: v1(29.36,27.386) R22.1
NetJ1_20: J1.20 P9.10 R24.1 | length 97.7
  Top Layer w0.5: J1.20 v1(12.2,48.9) ; v1(18.35,48.4) 20,48.4 20.95,49.35 22.2,49.35 22.664,48.886 v1(29.16,48.886) 40.064,48.886 44.4,44.55 v1(45.75,44.55) ; v1(60.9,42.602) 62.002,42.602 64.35,44.95 64.35,53.3 60.75,56.9 60.75,61.93 P9.10
  Bottom Layer w0.5: v1(12.2,48.9) 12.7,48.4 v1(18.35,48.4) ; v1(45.75,44.55) 46.4,43.9 50.95,43.9 52.248,42.602 v1(60.9,42.602)
  Bottom Layer w1: v1(29.16,48.886) R24.1
NetJ1_21: J1.21 U2.11 | length 67.8
  Top Layer w0.5: J1.21 -2.45,50.15 v1(3.45,50.15) ; v1(10.85,56.15) 11.25,55.75 v1(35.7,55.75) ; v1(52.05,47.65) 52.05,45.265 U2.11
  Bottom Layer w0.5: v1(3.45,50.15) 3.45,51.95 6.45,54.95 9.65,54.95 v1(10.85,56.15) ; v1(35.7,55.75) 39.9,55.75 48,47.65 v1(52.05,47.65)
NetJ1_22: J1.22 P9.11 R33.1 | length 134.5
  Top Layer w0.5: J1.22 v1@5.9,51.44 ; v1(4.64,39.51) 8.01,39.51 9.7,41.2 9.7,44.15 10.436,44.886 v1(14.96,44.886) ; v1(9.2,33.5) 9.75,34.05 17.15,34.05 19.1,36 24.52,36 v1(24.96,36.44) ; v1(29.06,36.84) 31.39,36.84 32.025,37.475 34.325,37.475 34.9,38.05 v1(45.75,38.05) ; v1(61.25,37.44) 61.75,37.44 63.85,39.54 v1(63.85,39.75) ; v1(63.85,42.65) 63.85,42.9 65.15,44.2 65.15,53.6 61.75,57 61.75,61.6 63.35,63.2 64.56,63.2 P9.11
  Bottom Layer w0.5: v1(5.9,51.45) 5.9,47.1 4.64,45.84 v1(4.64,39.51) 9.2,34.95 v1(9.2,33.5) ; v1(24.96,36.44) 25.36,36.84 v1(29.06,36.84) ; v1(45.75,38.05) 46.278,37.522 61.168,37.522 v1(61.25,37.44) ; v1(63.85,39.75) v1(63.85,42.65)
  Bottom Layer w1: v1(14.96,44.886) R33.1
NetJ1_23: J1.23 P9.9 R23.1 | length 117.6
  Top Layer w0.5: J1.23 -2.47,55.25 -0.3,55.25 1.15,53.8 11.25,53.8 12.15,54.7 23.45,54.7 ; v1(26.75,47.7) 27.85,46.6 27.85,39.346 v1(29.21,37.986) ; v1(26.8,49.95) 26.8,51.35 23.45,54.7 ; v1(45.85,45.85) 44.35,45.85 35.5,54.7 23.45,54.7 ; v1(61,45.05) 63.55,47.6 63.55,53.05 59.8,56.8 59.8,63.52 P9.9
  Bottom Layer w0.5: v1(26.75,47.7) 26.8,47.75 v1(26.8,49.95) ; v1(45.85,45.85) 46.61,45.09 v1@61,45.09
  Bottom Layer w1: v1(29.21,37.986) R23.1
NetJ1_24: J1.24 R34.1 | length 49.6
  Top Layer w0.5: J1.24 0.055,52.725 v1(8.075,52.725) ; v1(11.06,43.24) 19.84,43.24 20.65,44.05 25.8,44.05 26.95,42.9 26.95,39 27.71,38.24 27.71,34.436 v1(29.36,32.786)
  Bottom Layer w0.5: v1(8.075,52.725) 8.75,52.05 8.75,45.55 v1(11.06,43.24)
  Bottom Layer w1: v1(29.36,32.786) R34.1
NetP10_1: P10.1 R37.2 | length 50.1
  Top Layer w1: R37.2 26.114,67.386 26.76,66.74 37.29,66.74 v1(41.49,70.94) ; v1(67.53,70.94) P10.1
  Bottom Layer w1: v1(41.49,70.94) v1(67.53,70.94)
NetP11_2: P11.2 U2.24 | length 74.3
  Top Layer w0.5: U2.24 67.065,28.565 68.36,29.86 v1(68.36,39.84) ; P11.2 61.4,71.8 63.56,69.64 71.81,69.64 73.06,68.39 73.06,66.99 77.25,62.8 77.25,56.95 68.36,48.06 v1(68.36,42.64)
  Bottom Layer w0.5: v1(68.36,39.84) v1(68.36,42.64)
NetP12_4: P12.4 R39.1 R44.2 R47.2 | length 75.2
  Top Layer w0.5: v1(35.984,25.29) 37.944,27.25 v1(63.75,27.25) ; v1(69.65,53.85) 69.65,55.48 P12.4
  Top Layer w1: v1(29.26,24.086) 34.78,24.086 v1(35.984,25.29)
  Bottom Layer w0.5: v1(63.75,27.25) 63.95,27.45 63.95,34.6 66.3,36.95 66.3,51.85 68.3,53.85 v1(69.65,53.85)
  Bottom Layer w1: v1(29.26,24.086) R44.2 R47.2 ; R39.1 v1(35.984,25.29)
NetP12_5: P12.5 R41.1 R49.2 | length 40.6
  Bottom Layer w0.5: R41.1@70.046,20.708 R41.1 ; R49.2 71.4,22.3 72,22.9 72,50.35 71.75,50.6 71.75,55.7 72.35,56.3 73.01,56.3 P12.5
  Bottom Layer w1: R41.1@70.046,20.708 R49.2
NetP12_7: P12.7 R42.1 R50.2 | length 60.7
  Top Layer w0.5: P12.7 70.1,63.55 75.05,63.55 76.3,62.3 76.3,57.35 74.15,55.2 v1(72.9,55.2)
  Bottom Layer w0.5: R50.2 R50.2@70.054,17.008 ; R42.1 71.85,18.9 72.9,19.95 v1(72.9,55.2)
  Bottom Layer w1: R50.2@70.054,17.008 R42.1
NetP12_10: P12.10 R40.1 R45.2 R48.2 | length 75.3
  Top Layer w0.5: v1(32.15,60.45) 36.15,64.45 v1(42.2,64.45) ; v1(50.2,64.45) 51.9,64.45 52.25,64.8 v1(53.3,64.8)
  Top Layer w1: v1(29.16,45.286) 34.78,45.286 v1(35.984,46.49)
  Bottom Layer w0.5: v1(29.16,45.286) 27.95,46.496 27.95,56.25 v1(32.15,60.45) ; v1(42.2,64.45) v1(50.2,64.45) ; v1(53.3,64.8) 53.8,64.8 54,64.6 70.59,64.6 P12.10
  Bottom Layer w1: v1(29.16,45.286) R45.2 R48.2 ; R40.1 v1(35.984,46.49)
NetR1_1: R1.1 R4.2 R7.2 U2.3 | length 85.6
  Top Layer w0.5: v1(22.986,20.786) 27.514,20.786 28.25,20.05 34.25,20.05 36.85,22.65 54.9,22.65 58.25,26 v1(61.55,26) ; U2.3 54.795,55.25 56.7,55.25 58.5,53.45 58.5,40.1 v1(58.7,39.9) ; v1(60.9,39.9) 60.9,38.7 60.3,38.1 60.3,35.3 62.45,33.15 v1(62.5,33.15)
  Bottom Layer w0.5: R1.1@21.608,20.794 R1.1 v1(22.986,20.786) ; v1(58.7,39.9) v1(60.9,39.9) ; v1(61.55,26) 61.55,30.05 62.5,31 v1(62.5,33.15)
  Bottom Layer w1: R4.2 R7.2 R1.1@21.608,20.794
NetR2_1: R2.1 R5.2 R8.2 U2.5 | length 118.2
  Top Layer w0.5: v1(11.25,18.1) 16.9,12.45 44.05,12.45 47.25,15.65 49.8,15.65 58.8,24.65 61.6,24.65 v1(62.85,25.9) ; v1(12.064,27.086) v1(15.06,27.086) ; U2.5 54.713,52.628 56.969,52.628 57.6,51.997 57.6,39.05 57.95,38.7 v1(57.95,36.05) ; v1(58.35,32.4) 61.45,32.4 62.85,31 v1(62.85,29.65)
  Top Layer w1: v1(15.06,27.086) 20.256,27.086 21.56,28.39 v1(21.56,28.44)
  Bottom Layer w0.5: v1(11.25,18.1) 12.064,18.914 v1(12.064,27.086) ; v1(57.95,36.05) 57.95,32.8 v1(58.35,32.4) ; v1(62.85,25.9) v1(62.85,29.65)
  Bottom Layer w1: v1(15.06,27.086) R5.2 R8.2 ; v1(21.56,28.44) 21.56,27.118 R2.1
NetR3_1: R3.1 R6.2 R9.2 U2.8 | length 61.8
  Top Layer w0.5: 20.38,32.086 24.764,32.086 v1(25.4,31.45) ; v1(32.55,31) 33.35,31 36.05,33.7 45.95,33.7 49.7,37.45 49.7,41.1 51,42.4 51,49.05 52.1,50.15 54.785,50.15 U2.8
  Top Layer w1: v1(15.06,32.086) 20.38,32.086 v1(21.584,33.29)
  Bottom Layer w0.5: v1(25.4,31.45) 28.35,31.45 28.8,31 v1(32.55,31)
  Bottom Layer w1: v1(15.06,32.086) R6.2 R9.2 ; R3.1 v1(21.584,33.29)
NetR10_1: R10.1 R13.2 R16.2 U2.10 | length 74.2
  Top Layer w0.5: 21.891,38.447 v1(24.647,38.447) ; v1(26.45,53.55) v1(32.2,53.55) ; v1(34.1,60.55) 37.75,60.55 v1(38.85,61.65)
  Top Layer w1: v1(14.96,36.986) 16.336,36.986 17.49,38.14 v1(21.584,38.14)
  Bottom Layer w0.5: v1(24.647,38.447) 24.647,51.747 v1(26.45,53.55) ; v1(32.2,53.55) 32.2,58.65 v1(34.1,60.55) ; v1(38.85,61.65) 38.85,60.25 48.95,50.15 54.25,50.15 54.75,49.65 54.75,47.645 U2.10
  Bottom Layer w1: v1(14.96,36.986) R13.2 R16.2 ; R10.1 v1(21.584,38.14)
NetR11_1: R11.1 R14.2 R17.2 U2.13 | length 46
  Top Layer w0.5: v1(21.584,42.84) 25.16,42.84 v1(25.85,42.15) ; v1(29,42.15) 31.1,42.15 32.3,40.95 33.8,40.95 35.45,42.6 42.6,42.6 44.45,40.75 v1(46,40.75) ; v1(50.8,40.35) 51.715,41.265 U2.13
  Top Layer w1: v1(14.96,41.686) 20.43,41.686 v1(21.584,42.84)
  Bottom Layer w0.5: v1(25.85,42.15) v1(29,42.15) ; v1(46,40.75) 50.4,40.75 v1(50.8,40.35)
  Bottom Layer w1: v1(14.96,41.686) R14.2 R17.2 ; R11.1 v1(21.584,42.84)
NetR12_1: R12.1 R15.2 R18.2 U2.15 | length 123.3
  Top Layer w0.5: v1(9,19.35) 9,16.7 15.3,10.4 45.95,10.4 v1(48.65,13.1) ; v1(10.65,36.15) v1(10.65,39.3) ; v1(12.7,46.2) 16.05,49.55 16.05,51.886 ; v1(47.9,34.15) 51.6,37.85 52.635,37.85 U2.15
  Top Layer w1: v1(14.91,51.886) 16.05,51.886 v1@22.702,51.886
  Bottom Layer w0.5: v1(9,19.35) 9,27.5 10.65,29.15 v1(10.65,36.15) ; v1(10.65,39.3) 10.65,39.6 13,41.95 13,45.9 v1(12.7,46.2) ; v1(47.9,34.15) 47.1,33.35 47.1,14.65 v1(48.65,13.1)
  Bottom Layer w1: v1(14.91,51.886) R15.2 R18.2 ; R12.1 v1(22.71,51.894)
NetR19_1: R19.1 R22.2 R27.2 U2.21 | length 30.3
  Top Layer w0.5: v1(35.984,30.44) 36.441,30.897 53.51,30.897 U2.21
  Top Layer w1: v1(29.36,29.286) 30.546,28.1 33.644,28.1 v1(35.984,30.44)
  Bottom Layer w1: v1(29.36,29.286) R22.2 R27.2 ; R19.1 v1(35.984,30.44)
NetR20_1: R20.1 R23.2 R28.2 U2.12 | length 35.6
  Top Layer w0.5: v1(35.984,41.04) 42.61,41.04 44.2,39.45 v1(46.1,39.45) ; v1(51.45,39.15) 52.3,40 54.25,40 54.8,40.55 54.8,42.555 U2.12
  Top Layer w1: v1(29.21,39.886) 34.83,39.886 v1(35.984,41.04)
  Bottom Layer w0.5: v1(46.1,39.45) 46.4,39.15 v1(51.45,39.15)
  Bottom Layer w1: v1(29.21,39.886) R23.2 R28.2 ; R20.1 v1(35.984,41.04)
NetR21_1: R21.1 R24.2 R29.2 U2.16 | length 40.1
  Top Layer w0.5: v1(39.5,43.75) 42.7,43.75 44.55,41.9 v1(46,41.9)
  Top Layer w1: v1(29.16,50.786) 34.78,50.786 v1(35.984,51.99)
  Bottom Layer w0.5: R21.1 38.056,50.794 39.5,49.35 v1(39.5,43.75) ; v1(46,41.9) 50.75,41.9 52.65,40 54.775,40 U2.16
  Bottom Layer w1: v1(29.16,50.786) R24.2 R29.2 ; R21.1 v1(35.984,51.99)
NetR25_1: R25.1 R26.2 R30.2 U2.19 | length 41.6
  Top Layer w0.5: v1(35.984,19.99) v1(48.24,19.99) ; v1(48.25,24.8) v1(52.1,24.8)
  Top Layer w1: v1(29.41,18.84) 34.834,18.84 v1(35.984,19.99)
  Bottom Layer w0.5: v1@48.25,20 v1(48.25,24.8) ; v1(52.1,24.8) 52.1,32.235 U2.19
  Bottom Layer w1: v1(29.41,18.84) R26.2 R30.2 ; R25.1 v1(35.984,19.99)
NetR31_1: R31.1 R33.2 R35.2 U2.18 | length 116.1
  Top Layer w0.5: v1(10.15,19.4) 10.15,17.3 16,11.45 44.8,11.45 47.8,14.45 50.1,14.45 v1(59.1,23.45) ; v1(12.05,36.25) v1(12.05,39.45)
  Top Layer w1: v1(14.91,46.786) 20.38,46.786 v1(21.584,47.99)
  Bottom Layer w0.5: v1(10.15,19.4) 10.15,27.3 12.05,29.2 v1(12.05,36.25) ; v1(12.05,39.45) 13.85,41.25 13.85,45.726 v1(14.91,46.786) ; U2.18 54.847,34.982 54.847,24.503 55.9,23.45 v1(59.1,23.45)
  Bottom Layer w1: v1(14.91,46.786) R33.2 R35.2 ; R31.1 v1(21.584,47.99)
NetR32_1: R32.1 R34.2 R36.2 T2.1 | length 74.2
  Top Layer w0.5: T2.1 1.65,65.1 2.45,64.3 v1(2.45,54.95) ; v1(5.85,32.05) 12.6,32.05 13.7,33.15 17.8,33.15 19.65,35 23.7,35 v1(25.25,33.45)
  Top Layer w1: v1(29.31,34.686) 34.78,34.686 v1(35.984,35.89)
  Bottom Layer w0.5: v1(2.45,54.95) 2,54.5 2,37.75 5.85,33.9 v1(5.85,32.05) ; v1(25.25,33.45) 28.074,33.45 v1(29.31,34.686)
  Bottom Layer w1: v1(29.31,34.686) R34.2 R36.2 ; R32.1 v1(35.984,35.89)
NetR37_1: R37.1 T1.2 T1.4 | length 8.8
  Top Layer w1: T1.4 T1.2 28,68.754 R37.1
NetR38_2: R38.2 T1.1 U2.26 | length 79.9
  Top Layer w0.5: T1.1 24.31,71.74 23.66,71.09 23.66,64.39 30,58.05 38.15,58.05 39.5,56.7 v1(39.5,52) ; v1(40.55,23.7) 53.725,23.7 U2.26
  Bottom Layer w0.5: v1(39.5,52) 40.75,50.75 40.75,23.89 v1@40.56,23.7
  Bottom Layer w1: U2.26 57.799,26.025 R38.2
NetR52_1: R52.1 T2.3 T3.1 | length 6.5
  Top Layer w1: T3.1 -4.3,67.154 -2.904,67.154 -2.5,66.75 T2.3
NetU2_23: U2.23
USB_N: J1.27 P6.2 P7.3 P8.3 | length 34.7
  Bottom Layer w0.381: J1.27 -2.47,57.79 6.858,57.79 14.31,65.242 P6.2 14.31,72.86 P7.3 12.25,75.48 P8.3
USB_P: J1.28 P6.3 P7.2 P8.2 | length 29.6
  Top Layer w0.381: v1(12.3,72.99) P7.2
  Bottom Layer w0.381: J1.28 7.23,59.06 12.31,64.14 P6.3 v1@12.31,72.99 ; P8.2 14.25,75.46 P7.2
VCCR: J3.1 P12.2 | length 52.8
  Top Layer w0.5: P12.2 67.06,52.39 v1(67.8,51.65)
  Bottom Layer w0.5: J3.1 52.25,18.35 53.25,19.35 61.5,19.35 62.95,20.8 62.95,24.2 65.15,26.4 65.15,34.25 67.3,36.4 67.3,48.35 67.8,48.85 v1(67.8,51.65)
VCCT: J2.2 P12.1 | length 55.3
  Bottom Layer w0.5: J2.2 56.75,17.8 57.35,18.4 61.95,18.4 63.95,20.4 63.95,23.7 71.05,30.8 71.05,49.4 70.8,49.65 70.8,54.3 70.1,55 65.45,55 64.52,55.93 P12.1
pads on no net: J2.SM J3.SM P9.12 P12.6 U2.0 U2.22

## Polygon pours and split planes (outlines as drawn)
GND on Top Layer "GND_L01_P004" (solid, remove dead copper, pour order 4): -8.1,23.94 0,23.94 0,0 80.36,0 80.36,79.883 -8.1,79.883
GND on Bottom Layer "GND_L02_P005" (solid, remove dead copper, pour order 5): -8.1,23.94 0,23.94 0,0 80.36,0 80.36,79.883 -8.1,79.883

## Other copper
Top Layer:
  rectangle net GND: 4.75,69.05 21.9,70.5

## Silkscreen, mask and mechanical layers (free items; w line width, h text height)
Top Overlay:
  text "RX" at 62.95,74.15 h1.5 r180
  text "TX" at 70.3,72.7 h1.5 r180
  text "12V" at 56.8,72.3 h1.5 r180
  text "24V" at 50.25,72.25 h1.5 r180
  text "IR" at 62.95,72.25 h1.5 r180
  text "+" at 70.8,71.05 h1.5
  text "-" at 63.55,71 h1.5
  text "-" at 66.3,71 h1.5
  text "USB" at 15.25,70.95 h1.5 r180
  text "+" at 58.55,70.95 h1.5
  text "+" at 44.5,70.75 h1.5
  text "+" at 51.25,70.75 h1.5
  text "IR" at 70.05,70.75 h1.5 r180
  text "24V" at 33.05,69.85 h1.5 r270
  text "GND" at 35.2,69.85 h1.5 r270
  text "GND" at 37.4,69.85 h1.5 r270
  text "12V" at 39.55,69.7 h1.5 r270
  text "Stepper Driver" at 50.1,50.74 h1.5 r270
  text "WITI" at -7.1,45.65 h1.5 r270
  text "Voltage Regulator" at 75.2,41.84 h1.5 r270
  text "Koruza Expander Board / Institute IRNAS Race" at 45.3,22.55 h1.5 r180
Bottom Overlay:
  text "-" at 67.05,75.1 h1.5 r180
  text "+" at 69.6,75.1 h1.5 r180
  text "3V3" at 59.6,74.84 h1.5 r90
  text "RX" at 62.2,74.84 h1.5 r90
  text "GND" at 64.7,74.84 h1.5 r90
  text "GND" at 5.65,74.1 h1.5 r180
  text "D-" at 10.65,74.1 h1.5 r180
  text "D+" at 14.25,74.1 h1.5 r180
  text "5V" at 17.7,74.1 h1.5 r180
  text "12" at 70.4,66.54 h1.5 r180
  text "WITI GPIO" at 51.2,66.44 h1.5 r180
  text "1" at 43.4,66.14 h1.5 r180
  text "SFP" at 67.6,56.74 h1.5 r180
  text "Koruza Expander Board / Institute IRNAS Race" at 13.4,10.75 h1.5 r180
Mechanical 3:
  lines w0.254: -8.1,23.94 -8.1,79.883 2.517,79.883 80.36,79.883 80.36,0 0,0 0,23.94 -8.1,23.94

## Text inside footprints (layer, text, board x,y; h text height)
J1: Top Overlay "2" at 1.4,26.7 h1.5 r180; Top Overlay "1" at -5.4,26.75 h1.5 r180; Top Overlay "30" at 0.3,62.8 h1.5 r270; Top Overlay "29" at -7,62.8 h1.5 r270
U1: Top Overlay "IN-" at 79.484,15.156 h1.5 r180; Top Overlay "IN+" at 63.355,15.156 h1.5 r180; Top Overlay "OUT+" at 65.133,47.16 h1.5 r180; Top Overlay "OUT-" at 79.484,47.16 h1.5 r180
U2: Top Overlay "2" at 55.268,59.373 h1.5 r270; Top Overlay "1" at 52.728,59.119 h1.5 r270; Top Overlay "25" at 52.855,24.321 h1.5 r270; Top Overlay "26" at 55.395,24.321 h1.5 r270